# EAGLE board eeZee_big_tiny (EAGLE 6.3)
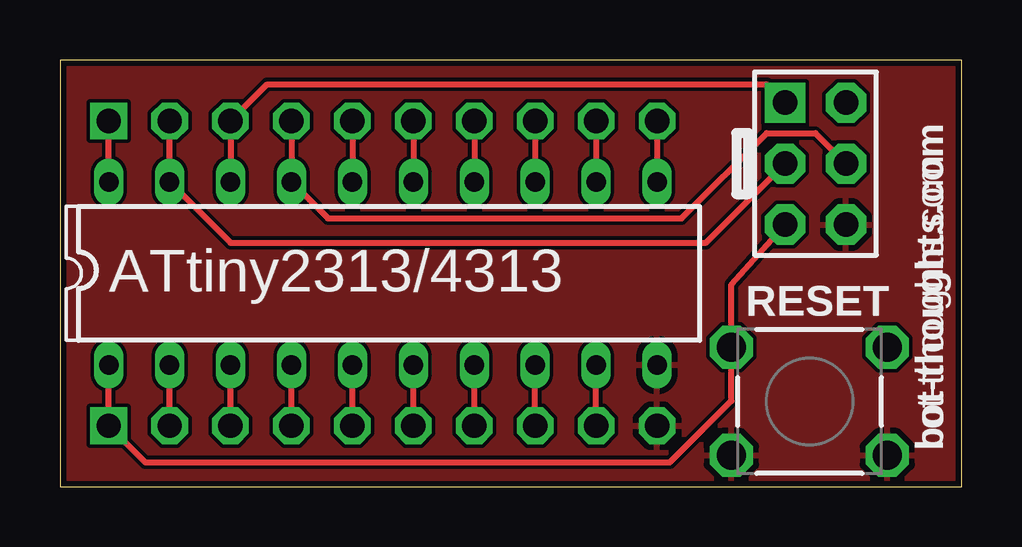
[diagram p0: board, top side]
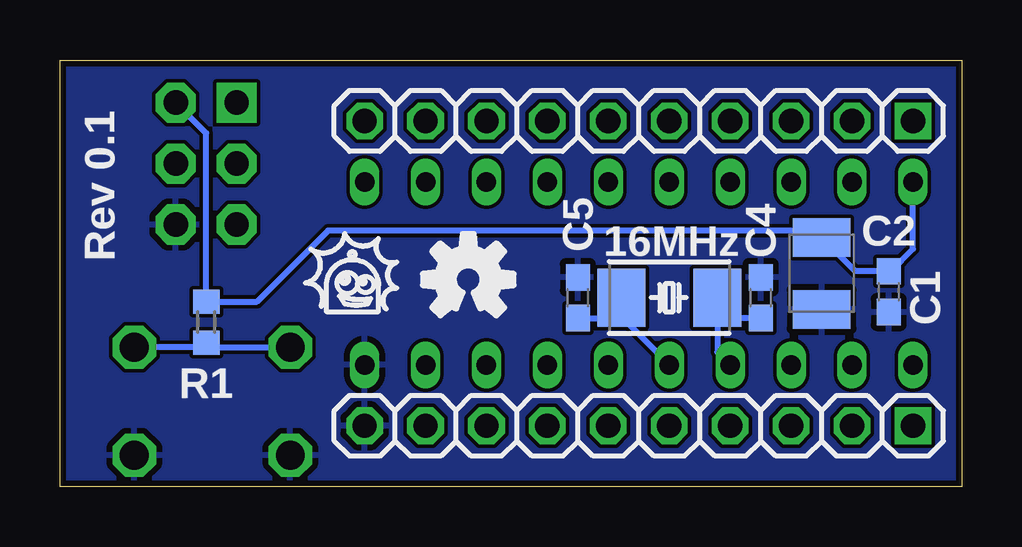
[diagram p1: board, bottom side, seen from below]

Size 37.59 x 17.78 mm. Coordinates in mm from the lower left corner, seen from the top.
Outline: 0,0 37.59,0 37.59,17.78 0,17.78 0,0
Copper layers (1*16): Top 0.0356mm / dielectric 1.5011mm / Bottom 0.0356mm
Design rules "default *": minimum track width 6mil, minimum drill 13mil, track to track 6mil, track to pad 6mil, pad to pad 6mil, via to via 6mil, smd to smd 6mil, copper to edge 10mil, drill to drill 6mil, minimum pad ring 7mil, minimum via ring 7mil, stop-mask expansion 4mil, vias tented up to drill 0mil, thermal gap 10mil

## Footprints (pad centres in the part's own frame; a part is rotated, then mirrored left to right if it is on the bottom)
C0603 = smd 1.1 x 1: 1 -0.85,0; 2 0.85,0
SMC_B = smd 1.6 x 2.4: + -1.5,0; - 1.5,0
DIL20 = drill 0.813 long: 1 -11.43,-3.81; 2 -8.89,-3.81; 3 -6.35,-3.81; 4 -3.81,-3.81; 5 -1.27,-3.81; 6 1.27,-3.81; 7 3.81,-3.81; 8 6.35,-3.81; 9 8.89,-3.81; 10 11.43,-3.81; 11 11.43,3.81; 12 8.89,3.81; 13 6.35,3.81; 14 3.81,3.81; 15 1.27,3.81; 16 -1.27,3.81; 17 -3.81,3.81; 18 -6.35,3.81; 19 -8.89,3.81; 20 -11.43,3.81
CON6P2R = drill 1.016 pad 1.676 square: 1 -2.54,-1.27 | drill 1.016 pad 1.676 octagon: 2 -2.54,1.27; 3 0,-1.27; 4 0,1.27; 5 2.54,-1.27; 6 2.54,1.27
1X10-S = drill 1.016 square: 1 -11.43,0 | drill 1.016 octagon: 2 -8.89,0; 3 -6.35,0; 4 -3.81,0; 5 -1.27,0; 6 1.27,0; 7 3.81,0; 8 6.35,0; 9 8.89,0; 10 11.43,0
NDK_2PAD_5X3 = smd 2 x 2.4: P$1 -2,0; P$2 2,0
R0603 = smd 1 x 1.1: 1 -0.85,0; 2 0.85,0
6MMTACTILE_4PIN = drill 1.2 octagon: A1 3.25,-2.25; A2 -3.25,-2.25; B1 3.25,2.25; B2 -3.25,2.25

## Placement (x,y rotation side)
C1  0.1uF  [C0603]  3.05,8.13 270 bottom
C2  100uF  [SMC_B]  5.84,8.89 270 bottom
C4  8pF  [C0603]  8.38,7.87 90 bottom
C5  8pF  [C0603]  16,7.87 90 bottom
IC1  ATtiny2313/4313  [DIL20]  13.46,8.89 0 top
J2  avrisp  [CON6P2R]  31.5,13.46 270 top
JP2  [1X10-S]  13.46,15.24 180 bottom
JP3  [1X10-S]  13.46,2.54 180 bottom
Q1  16MHz  [NDK_2PAD_5X3]  12.19,7.87 0 bottom
R1  10k  [R0603]  31.5,6.86 90 bottom
S2  RESET  [6MMTACTILE_4PIN]  31.24,3.56 0 top

## Library data of the parts
C1 = rcl; BOM: EXCLUDE; PARTNO: 0603YC104KAT2A
C2 = rcl; BOM: EXCLUDE; DATABASE: ./../../../EAGLE/PARTSDB.TXT; PARTNO: MCTT21X106M6R3CT
C4 C5 = rcl; BOM: EXCLUDE; DATABASE: ./../../../EAGLE/PARTSDB.TXT; PARTNO: 0603YC104KAT2A
IC1 = avr-7
J2 = ads4
JP2 JP3 = pinhead-2
Q1 = mes_crystal
R1 = rcl; PARTNO: ERJ-3GEYJ103V
S2 = mes_electromech

## Nets
!RESET: IC1.1 J2.5 JP3.1 R1.1 S2.B1 S2.B2
GND: C1.2 C2.- C4.2 C5.2 IC1.10 J2.6 JP3.10 S2.A1 S2.A2
N$2: IC1.18 J2.1 JP2.3
N$3: IC1.17 J2.4 JP2.4
N$4: IC1.19 J2.3 JP2.2
N$6: IC1.6 JP3.6
N$7: IC1.7 JP3.7
N$8: IC1.8 JP3.8
N$9: IC1.9 JP3.9
N$10: IC1.11 JP2.10
N$11: IC1.12 JP2.9
N$12: IC1.13 JP2.8
N$13: IC1.14 JP2.7
N$14: IC1.15 JP2.6
N$15: IC1.16 JP2.5
RXI: IC1.3 JP3.3
TXO: IC1.2 JP3.2
VCC: C1.1 C2.+ IC1.20 J2.2 JP2.1 R1.2
XTAL1: C5.1 IC1.5 JP3.5 Q1.P$1
XTAL2: C4.1 IC1.4 JP3.4 Q1.P$2

## Tracks (layer width: path | path; a pad name or v marks a point on that pad's centre or on a via)
!RESET
  Top 0.254: IC1.1 JP3.1 3.56,1.02 25.43,1.02 27.99,3.58 S2.B2 27.99,8.43 J2.5
  Bottom 0.254: S2.B2 31.29,5.81 R1.1 31.7,5.81 S2.B1
GND
  pour Bottom: 0,17.78 37.59,17.78 37.59,0 0,0
  pour Top: 0,17.78 37.59,17.78 37.59,0 0,0
N$2
  Top 0.254: J2.1 29.46,16.76 8.64,16.76 JP2.3 IC1.18
N$3
  Top 0.254: J2.4 31.5,14.73 29.46,14.73 25.91,11.18 11.18,11.18 IC1.17 JP2.4
N$4
  Top 0.254: J2.3 26.92,10.16 7.11,10.16 IC1.19 JP2.2
N$6
  Top 0.254: JP3.6 IC1.6
N$7
  Top 0.254: JP3.7 IC1.7
N$8
  Top 0.254: JP3.8 IC1.8
N$9
  Top 0.254: JP3.9 IC1.9
N$10
  Top 0.254: JP2.10 IC1.11
N$11
  Top 0.254: JP2.9 IC1.12
N$12
  Top 0.254: JP2.8 IC1.13
N$13
  Top 0.254: JP2.7 IC1.14
N$14
  Top 0.254: JP2.6 IC1.15
N$15
  Top 0.254: JP2.5 IC1.16
RXI
  Top 0.254: JP3.3 IC1.3
TXO
  Top 0.254: JP3.2 IC1.2
VCC
  Top 0.254: IC1.20 JP2.1
  Bottom 0.254: J2.2 31.5,14.73 R1.2 29.38,7.71 26.42,10.67 7.11,10.67 6.83,10.39 C2.+ 4.43,8.98 C1.1 2.96,8.98 2.03,9.91 IC1.20
XTAL1
  Top 0.254: JP3.5 IC1.5
  Bottom 0.254: IC1.5 14.19,7.08 Q1.P$1 15.04,7.02 C5.1
XTAL2
  Top 0.254: JP3.4 IC1.4
  Bottom 0.254: IC1.4 10.19,5.62 Q1.P$2 9.34,7.02 C4.1

## Text on the board
tNames: bot-thoughts.com
bNames: Rev 0.1
tsilk: ATtiny2313/4313 | RESET | bot-thoughts.com
bsilk: C2 | C4 | 16MHz | C5 | C1 | Rev 0.1 | R1